# Altium PCB christmas_tree_panel_pcb.PcbDoc
Units mil, origin at the board's own origin, x right, y up, seen from the top; angles counter-clockwise.
Board outline not stored, 2 copper layers (Top Layer, Bottom Layer); 136 components, 0 nets, 304 pads, 116 vias.
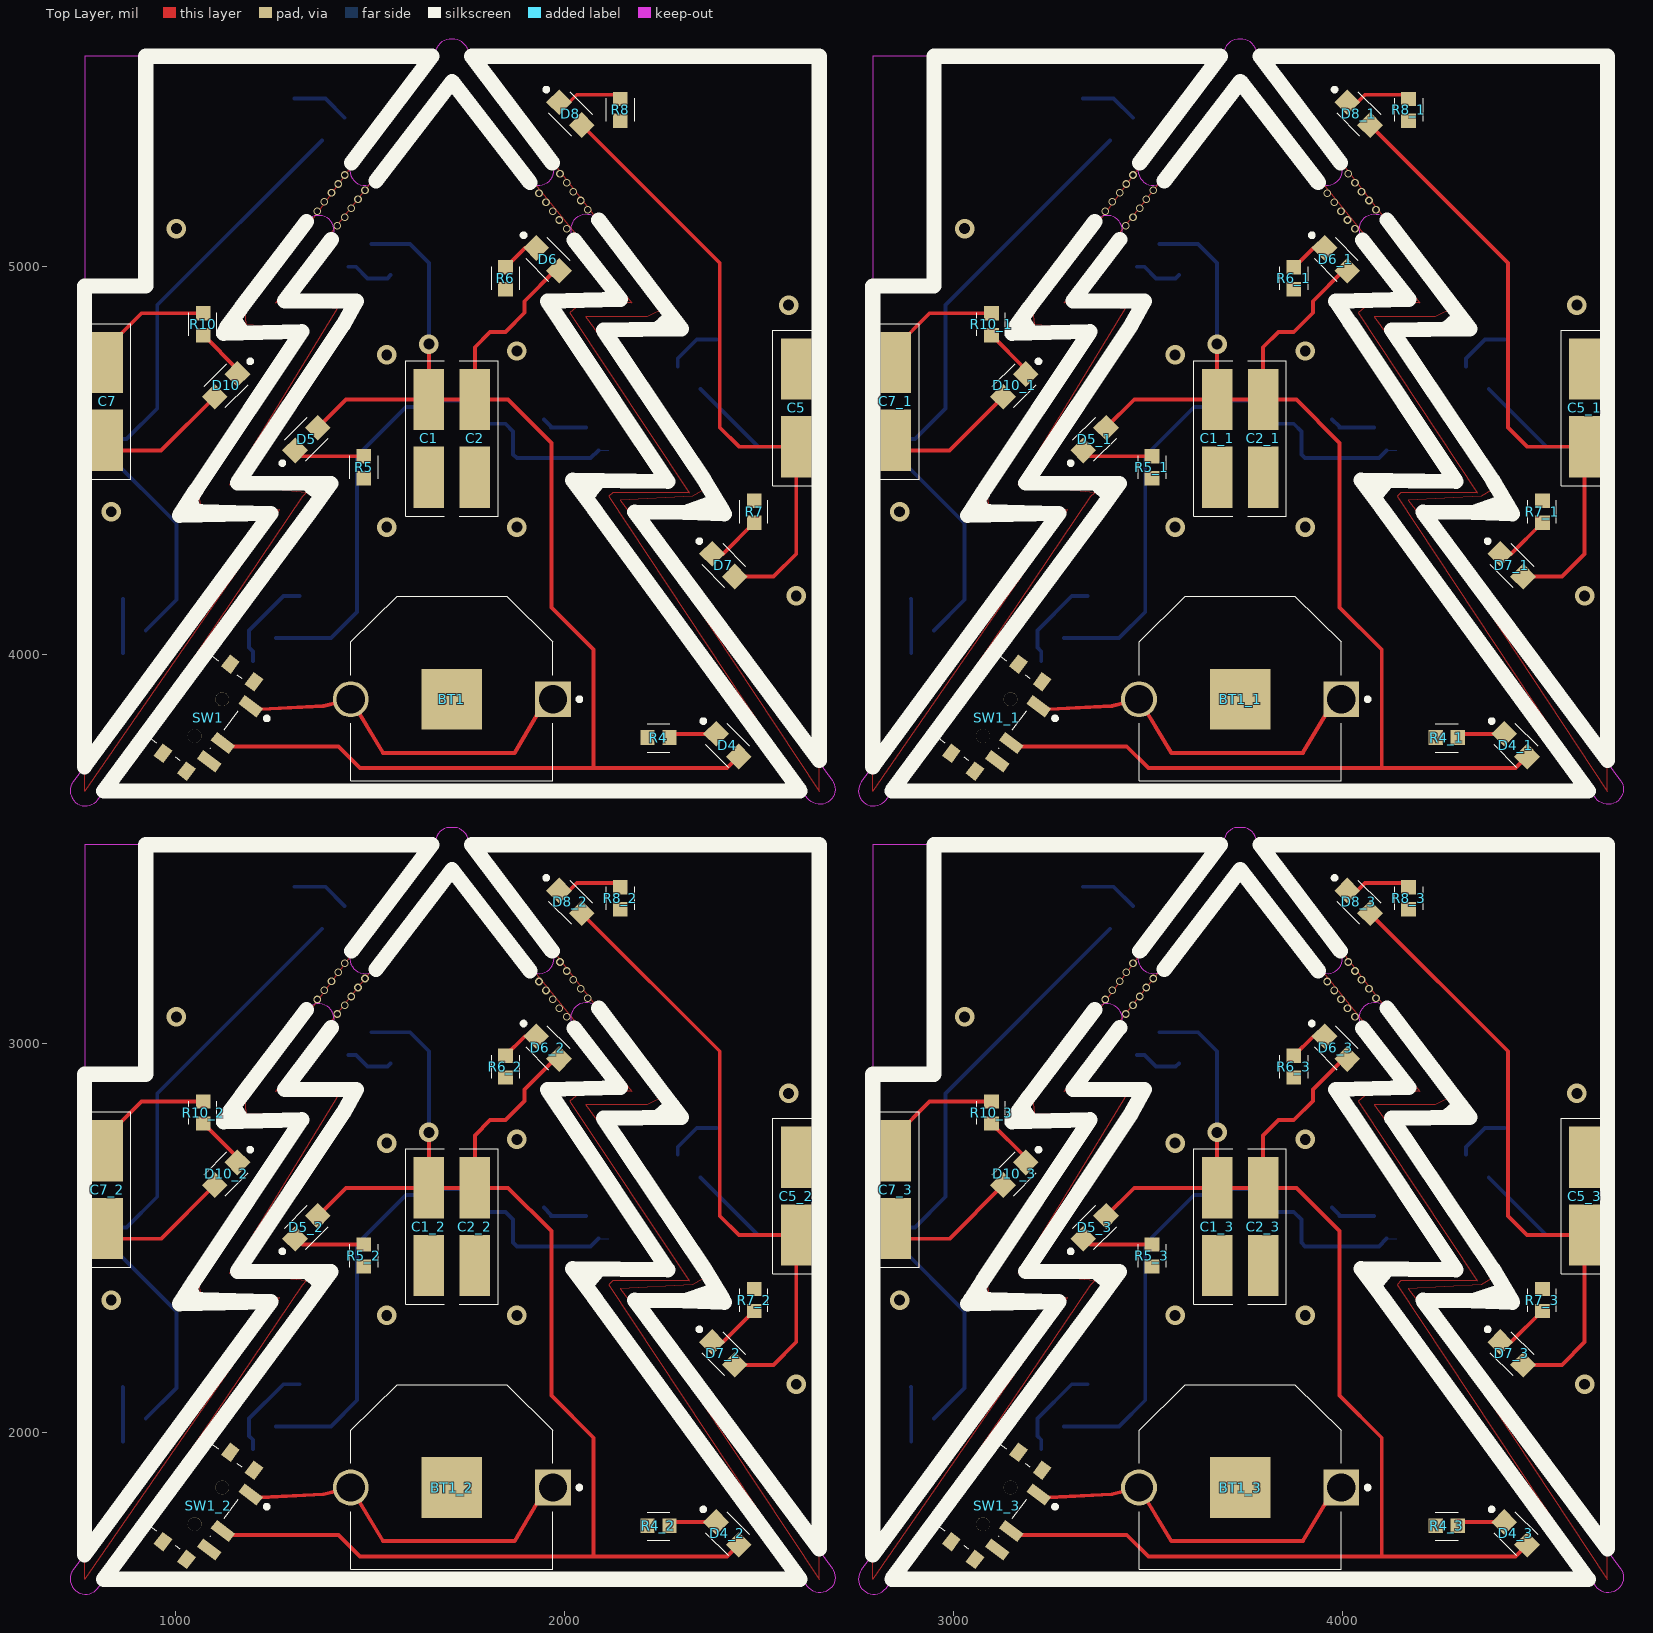
[diagram p0: Top Layer view]
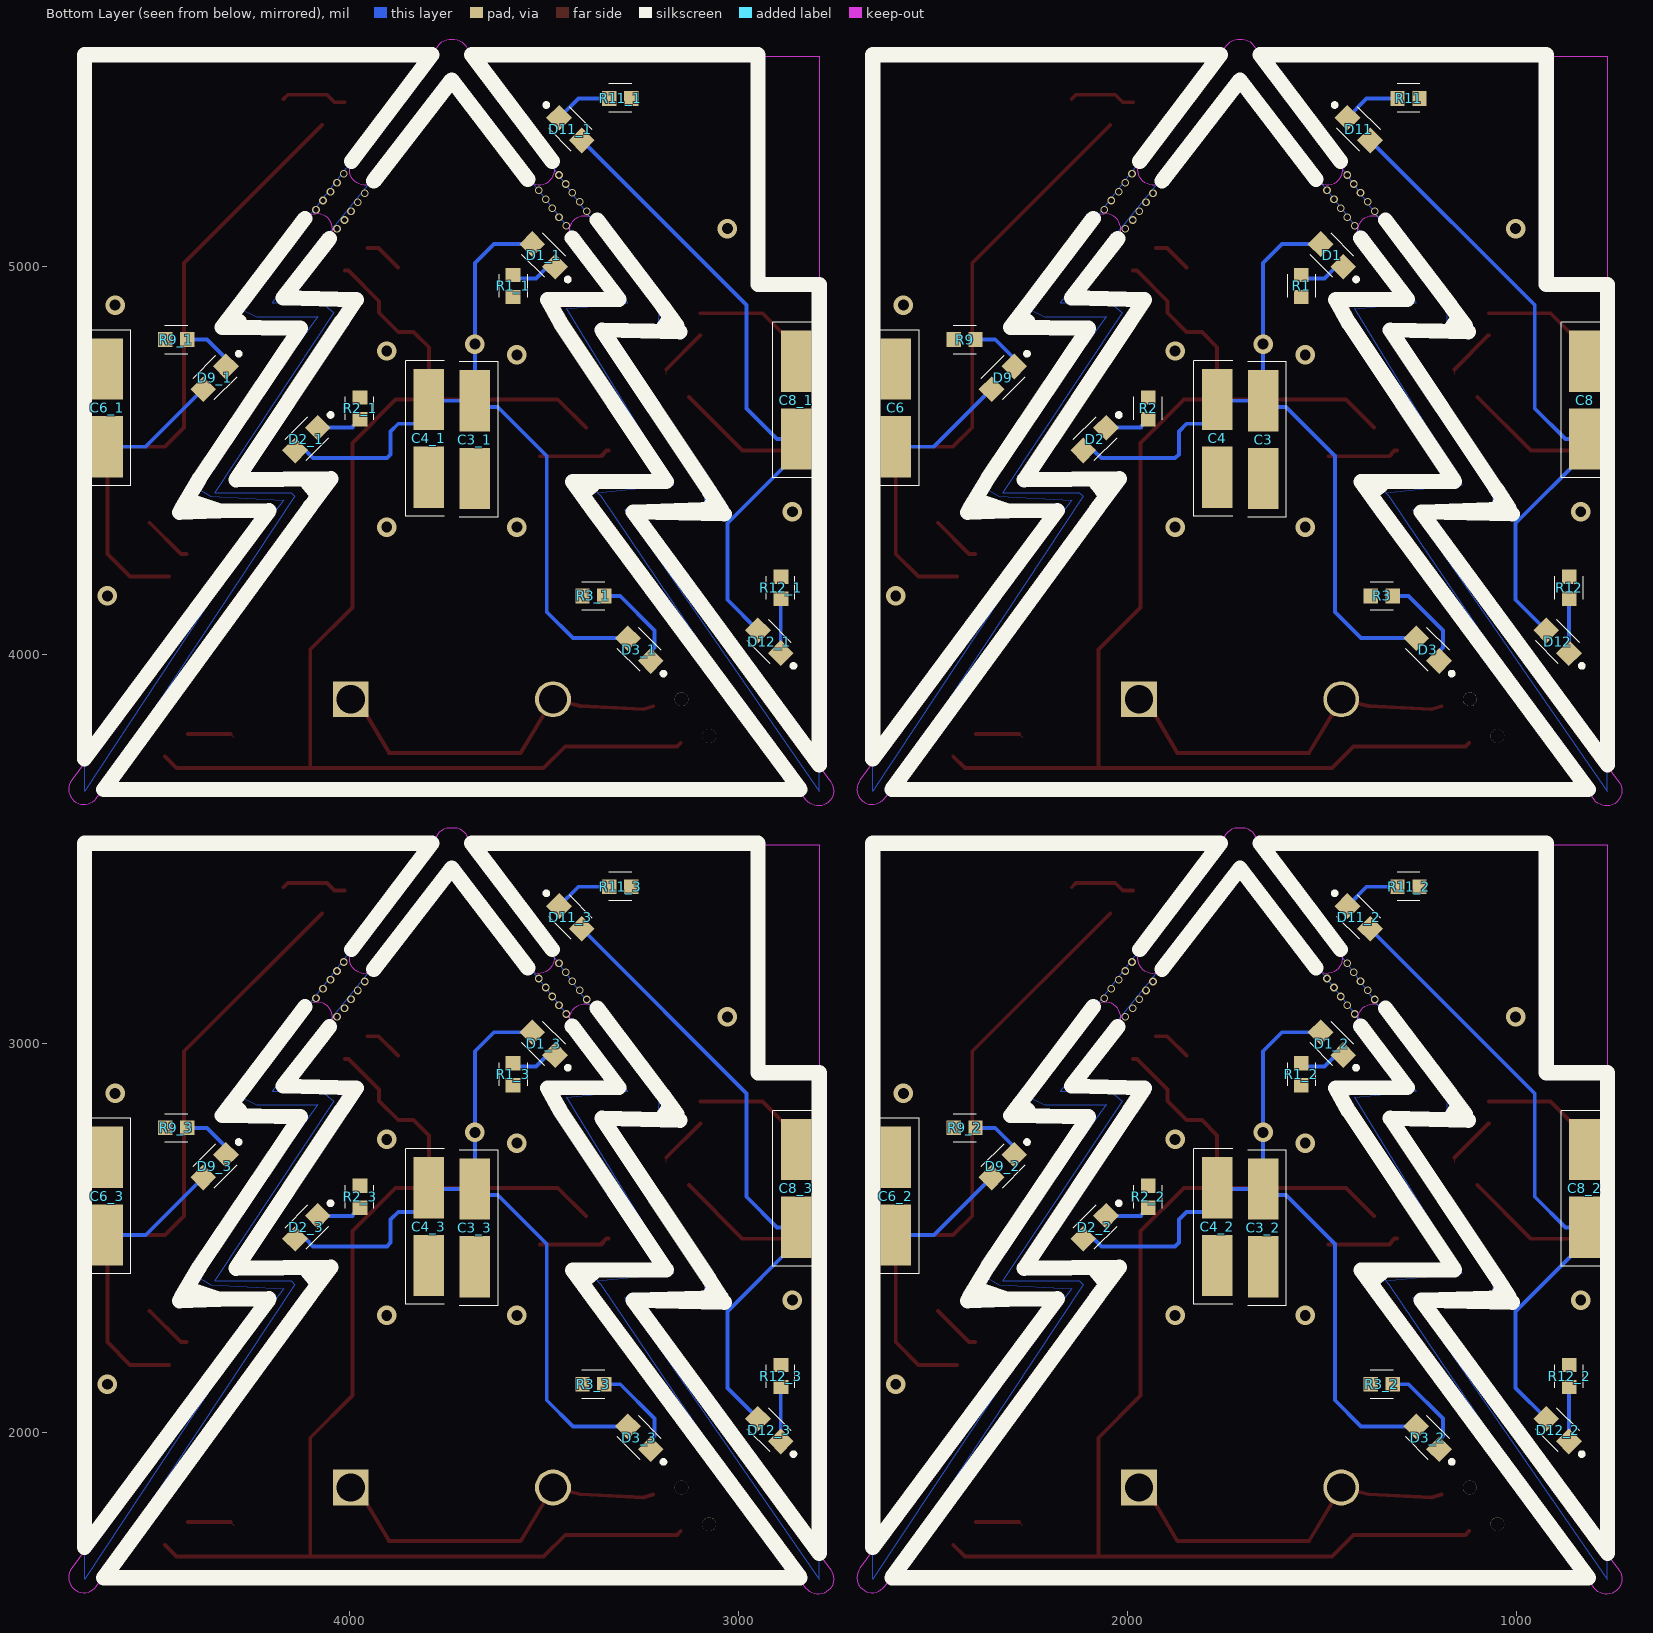
[diagram p1: Bottom Layer view, seen from below]

## Layer stack, top to bottom
Top Solder: solder mask 0.4, Solder Resist, Dk 3.5
Top Layer: signal copper 1.4
Dielectric 1: dielectric 12.6, FR-4, Dk 4.8
Bottom Layer: signal copper 1.4
Bottom Solder: solder mask 0.4, Solder Resist, Dk 3.5
cut-out: 735.47,3674.27 ccw(c767.17,3650.91) 798.88,3627.55 1352.97,4379.53 ccw(c1321.28,4402.91) 1360.66,4402.91 ccw(c1321.28,4402.91) 1321.28,4442.3 1158.37,4442.3 1429.86,4849.54 ccw(c1397.09,4871.38) 1436.48,4871.38 ccw(c1397.09,4871.38) 1397.09,4910.77 1279.67,4910.77 1398.52,5067.07 ccw(c1367.17,5090.91) 1406.56,5090.91 ccw(c1367.17,5090.91) 1335.82,5114.75 1168.89,4895.22 ccw(c1200.24,4871.38) 1200.24,4832 1323.5,4832 1052.01,4424.76 ccw(c1084.78,4402.91) 1084.78,4363.53 1243.34,4363.53
cut-out: 1454.88,5271.32 ccw(c1486.16,5247.39) 1517.45,5223.47 1709.67,5474.83 1901.88,5223.47 ccw(c1933.17,5247.39) 1972.55,5247.39 ccw(c1933.17,5247.39) 1964.45,5271.32 1752.41,5548.61 ccw(c1713.25,5544.36) 1709.67,5583.58 ccw(c1706.08,5544.36) 1666.92,5548.61
cut-out: 764.67,4948.96 922.15,4948.96 922.15,5539.51 764.67,5539.51
cut-out: 2687.57,3678.21 cw(c2655.86,3654.85) 2624.15,3631.48 2070.06,4383.47 cw(c2101.75,4406.85) 2062.37,4406.85 cw(c2101.75,4406.85) 2101.75,4446.23 2264.66,4446.23 1993.17,4853.47 cw(c2025.94,4875.32) 1986.55,4875.32 cw(c2025.94,4875.32) 2025.94,4914.71 2143.36,4914.71 2024.51,5071.01 cw(c2055.86,5094.85) 2016.47,5094.85 cw(c2055.86,5094.85) 2087.21,5118.69 2254.14,4899.16 cw(c2222.79,4875.32) 2222.79,4835.94 2099.53,4835.94 2371.02,4428.69 cw(c2338.25,4406.85) 2338.25,4367.46 2179.7,4367.46
cut-out: 4715.12,3678.21 cw(c4683.42,3654.85) 4651.71,3631.48 4097.62,4383.47 cw(c4129.31,4406.85) 4089.93,4406.85 cw(c4129.31,4406.85) 4129.31,4446.23 4292.22,4446.23 4020.73,4853.47 cw(c4053.5,4875.32) 4014.11,4875.32 cw(c4053.5,4875.32) 4053.5,4914.71 4170.92,4914.71 4052.07,5071.01 cw(c4083.42,5094.85) 4044.03,5094.85 cw(c4083.42,5094.85) 4114.77,5118.69 4281.7,4899.16 cw(c4250.35,4875.32) 4250.35,4835.94 4127.09,4835.94 4398.58,4428.69 cw(c4365.81,4406.85) 4365.81,4367.46 4207.26,4367.46
cut-out: 2792.22,4948.96 2949.7,4948.96 2949.7,5539.51 2792.22,5539.51
cut-out: 3482.44,5271.32 ccw(c3513.72,5247.39) 3545.01,5223.47 3737.22,5474.83 3929.44,5223.47 ccw(c3960.73,5247.39) 4000.11,5247.39 ccw(c3960.73,5247.39) 3992.01,5271.32 3779.97,5548.61 ccw(c3740.81,5544.36) 3737.22,5583.58 ccw(c3733.64,5544.36) 3694.48,5548.61
cut-out: 2763.02,3674.27 ccw(c2794.73,3650.91) 2826.44,3627.55 3380.53,4379.53 ccw(c3348.84,4402.91) 3388.22,4402.91 ccw(c3348.84,4402.91) 3348.84,4442.3 3185.93,4442.3 3457.42,4849.54 ccw(c3424.65,4871.38) 3464.04,4871.38 ccw(c3424.65,4871.38) 3424.65,4910.77 3307.23,4910.77 3426.08,5067.07 ccw(c3394.73,5090.91) 3434.12,5090.91 ccw(c3394.73,5090.91) 3363.38,5114.75 3196.45,4895.22 ccw(c3227.8,4871.38) 3227.8,4832 3351.06,4832 3079.57,4424.76 ccw(c3112.34,4402.91) 3112.34,4363.53 3270.89,4363.53
cut-out: 2687.57,1650.65 cw(c2655.86,1627.29) 2624.15,1603.93 2070.06,2355.91 cw(c2101.75,2379.29) 2062.37,2379.29 cw(c2101.75,2379.29) 2101.75,2418.67 2264.66,2418.67 1993.17,2825.91 cw(c2025.94,2847.76) 1986.55,2847.76 cw(c2025.94,2847.76) 2025.94,2887.15 2143.36,2887.15 2024.51,3043.45 cw(c2055.86,3067.29) 2016.47,3067.29 cw(c2055.86,3067.29) 2087.21,3091.13 2254.14,2871.6 cw(c2222.79,2847.76) 2222.79,2808.38 2099.53,2808.38 2371.02,2401.14 cw(c2338.25,2379.29) 2338.25,2339.9 2179.7,2339.9
cut-out: 764.67,2921.4 922.15,2921.4 922.15,3511.95 764.67,3511.95
cut-out: 1454.88,3243.76 ccw(c1486.16,3219.83) 1517.45,3195.91 1709.67,3447.27 1901.88,3195.91 ccw(c1933.17,3219.83) 1972.55,3219.83 ccw(c1933.17,3219.83) 1964.45,3243.76 1752.41,3521.05 ccw(c1713.25,3516.8) 1709.67,3556.02 ccw(c1706.08,3516.8) 1666.92,3521.05
cut-out: 735.47,1646.71 ccw(c767.17,1623.35) 798.88,1599.99 1352.97,2351.97 ccw(c1321.28,2375.35) 1360.66,2375.35 ccw(c1321.28,2375.35) 1321.28,2414.74 1158.37,2414.74 1429.86,2821.98 ccw(c1397.09,2843.82) 1436.48,2843.82 ccw(c1397.09,2843.82) 1397.09,2883.21 1279.67,2883.21 1398.52,3039.51 ccw(c1367.17,3063.35) 1406.56,3063.35 ccw(c1367.17,3063.35) 1335.82,3087.19 1168.89,2867.66 ccw(c1200.24,2843.82) 1200.24,2804.44 1323.5,2804.44 1052.01,2397.2 ccw(c1084.78,2375.35) 1084.78,2335.97 1243.34,2335.97
cut-out: 4715.12,1650.65 cw(c4683.42,1627.29) 4651.71,1603.93 4097.62,2355.91 cw(c4129.31,2379.29) 4089.93,2379.29 cw(c4129.31,2379.29) 4129.31,2418.67 4292.22,2418.67 4020.73,2825.91 cw(c4053.5,2847.76) 4014.11,2847.76 cw(c4053.5,2847.76) 4053.5,2887.15 4170.92,2887.15 4052.07,3043.45 cw(c4083.42,3067.29) 4044.03,3067.29 cw(c4083.42,3067.29) 4114.77,3091.13 4281.7,2871.6 cw(c4250.35,2847.76) 4250.35,2808.38 4127.09,2808.38 4398.58,2401.14 cw(c4365.81,2379.29) 4365.81,2339.9 4207.26,2339.9
cut-out: 2792.22,2921.4 2949.7,2921.4 2949.7,3511.95 2792.22,3511.95
cut-out: 3482.44,3243.76 ccw(c3513.72,3219.83) 3545.01,3195.91 3737.22,3447.27 3929.44,3195.91 ccw(c3960.73,3219.83) 4000.11,3219.83 ccw(c3960.73,3219.83) 3992.01,3243.76 3779.97,3521.05 ccw(c3740.81,3516.8) 3737.22,3556.02 ccw(c3733.64,3516.8) 3694.48,3521.05
cut-out: 2763.02,1646.71 ccw(c2794.73,1623.35) 2826.44,1599.99 3380.53,2351.97 ccw(c3348.84,2375.35) 3388.22,2375.35 ccw(c3348.84,2375.35) 3348.84,2414.74 3185.93,2414.74 3457.42,2821.98 ccw(c3424.65,2843.82) 3464.04,2843.82 ccw(c3424.65,2843.82) 3424.65,2883.21 3307.23,2883.21 3426.08,3039.51 ccw(c3394.73,3063.35) 3434.12,3063.35 ccw(c3394.73,3063.35) 3363.38,3087.19 3196.45,2867.66 ccw(c3227.8,2843.82) 3227.8,2804.44 3351.06,2804.44 3079.57,2397.2 ccw(c3112.34,2375.35) 3112.34,2335.97 3270.89,2335.97

## Design rules (kind name [scope] priority, off if disabled: settings)
Clearance [All] p1: gap=10 ignorepadtopadclearanceinfootprint=FALSE except(0: Arc-Hole Track-Hole SMDPad-Hole THPad-Hole Via-Hole Fill-Hole Poly-Hole Region-Hole Text-Hole)
PolygonConnect [All] p1: connectstyle=Relief reliefconductorwidth=10 reliefentries=4 polygonreliefangle="90 Angle" airgapwidth=10
RoutingVias [All] p1: holewidth=28 width=50 viastyle="Through Hole" minholewidth=28 minwidth=50 maxholewidth=28 maxwidth=50
SolderMaskExpansion [All] p1: expansion=4 istentingtop=FALSE
Width [All] p1: maxlimit=10 minlimit=10 preferedwidth=10
30 further rules are at their usual default settings.

## Components (designator, comment, footprint, x,y, rotation, side; value= is the part's Value field where it differs from the comment)
BT1 "3001" KSTN-3001_V 1709.55,3885.97 r180 top
BT1_1 "3001" KSTN-3001_V 3737.11,3885.97 r180 top (schematic designator BT1)
BT1_2 "3001" KSTN-3001_V 1709.55,1858.41 r180 top (schematic designator BT1)
BT1_3 "3001" KSTN-3001_V 3737.11,1858.41 r180 top (schematic designator BT1)
C1 "conn_pcb" pcb_connector 1650.49,4656.84 r270 top
C1_1 "conn_pcb" pcb_connector 3678.05,4656.84 r270 top (schematic designator C1)
C1_2 "conn_pcb" pcb_connector 1650.49,2629.28 r270 top (schematic designator C1)
C1_3 "conn_pcb" pcb_connector 3678.05,2629.28 r270 top (schematic designator C1)
C2 "conn_pcb" pcb_connector 1768.6,4656.84 r270 top
C2_1 "conn_pcb" pcb_connector 3796.16,4656.84 r270 top (schematic designator C2)
C2_2 "conn_pcb" pcb_connector 1768.6,2629.28 r270 top (schematic designator C2)
C2_3 "conn_pcb" pcb_connector 3796.16,2629.28 r270 top (schematic designator C2)
C3 "conn_pcb" pcb_connector 1650.49,4653.69 r270 bottom
C3_1 "conn_pcb" pcb_connector 3678.05,4653.69 r270 bottom (schematic designator C3)
C3_2 "conn_pcb" pcb_connector 1650.49,2626.13 r270 bottom (schematic designator C3)
C3_3 "conn_pcb" pcb_connector 3678.05,2626.13 r270 bottom (schematic designator C3)
C4 "conn_pcb" pcb_connector 1768.6,4656.84 r270 bottom
C4_1 "conn_pcb" pcb_connector 3796.16,4656.84 r270 bottom (schematic designator C4)
C4_2 "conn_pcb" pcb_connector 1768.6,2629.28 r270 bottom (schematic designator C4)
C4_3 "conn_pcb" pcb_connector 3796.16,2629.28 r270 bottom (schematic designator C4)
C5 "conn_pcb" pcb_connector 2595.37,4535.58 r90 top
C5_1 "conn_pcb" pcb_connector 4622.93,4535.58 r90 top (schematic designator C5)
C5_2 "conn_pcb" pcb_connector 2595.37,2508.02 r90 top (schematic designator C5)
C5_3 "conn_pcb" pcb_connector 4622.93,2508.02 r90 top (schematic designator C5)
C6 "conn_pcb" pcb_connector 2595.37,4535.58 r90 bottom
C6_1 "conn_pcb" pcb_connector 4622.93,4535.58 r90 bottom (schematic designator C6)
C6_2 "conn_pcb" pcb_connector 2595.37,2508.02 r90 bottom (schematic designator C6)
C6_3 "conn_pcb" pcb_connector 4622.93,2508.02 r90 bottom (schematic designator C6)
C7 "conn_pcb" pcb_connector 823.72,4552.11 r90 top
C7_1 "conn_pcb" pcb_connector 2851.28,4552.11 r90 top (schematic designator C7)
C7_2 "conn_pcb" pcb_connector 823.72,2524.55 r90 top (schematic designator C7)
C7_3 "conn_pcb" pcb_connector 2851.28,2524.55 r90 top (schematic designator C7)
C8 "conn_pcb" pcb_connector 823.72,4555.26 r90 bottom
C8_1 "conn_pcb" pcb_connector 2851.28,4555.26 r90 bottom (schematic designator C8)
C8_2 "conn_pcb" pcb_connector 823.72,2527.7 r90 bottom (schematic designator C8)
C8_3 "conn_pcb" pcb_connector 2851.28,2527.7 r90 bottom (schematic designator C8)
D1 "APHCM2012SYCK-F01" FP-APHCM2012SYCK-F01-MFG 1473.33,5027.7 r45 bottom
D1_1 "APHCM2012SYCK-F01" FP-APHCM2012SYCK-F01-MFG 3500.89,5027.7 r45 bottom (schematic designator D1)
D1_2 "APHCM2012SYCK-F01" FP-APHCM2012SYCK-F01-MFG 1473.33,3000.14 r45 bottom (schematic designator D1)
D1_3 "APHCM2012SYCK-F01" FP-APHCM2012SYCK-F01-MFG 3500.89,3000.14 r45 bottom (schematic designator D1)
D2 "APHCM2012SYCK-F01" FP-APHCM2012SYCK-F01-MFG 2083.56,4555.26 r315 bottom
D2_1 "APHCM2012SYCK-F01" FP-APHCM2012SYCK-F01-MFG 4111.12,4555.26 r315 bottom (schematic designator D2)
D2_2 "APHCM2012SYCK-F01" FP-APHCM2012SYCK-F01-MFG 2083.56,2527.7 r315 bottom (schematic designator D2)
D2_3 "APHCM2012SYCK-F01" FP-APHCM2012SYCK-F01-MFG 4111.12,2527.7 r315 bottom (schematic designator D2)
D3 "APHCM2012SYCK-F01" FP-APHCM2012SYCK-F01-MFG 1227.26,4013.92 r45 bottom
D3_1 "APHCM2012SYCK-F01" FP-APHCM2012SYCK-F01-MFG 3254.82,4013.92 r45 bottom (schematic designator D3)
D3_2 "APHCM2012SYCK-F01" FP-APHCM2012SYCK-F01-MFG 1227.26,1986.36 r45 bottom (schematic designator D3)
D3_3 "APHCM2012SYCK-F01" FP-APHCM2012SYCK-F01-MFG 3254.82,1986.36 r45 bottom (schematic designator D3)
D4 "APHCM2012SYCK-F01" FP-APHCM2012SYCK-F01-MFG 2418.21,3767.86 r315 top
D4_1 "APHCM2012SYCK-F01" FP-APHCM2012SYCK-F01-MFG 4445.77,3767.86 r315 top (schematic designator D4)
D4_2 "APHCM2012SYCK-F01" FP-APHCM2012SYCK-F01-MFG 2418.21,1740.3 r315 top (schematic designator D4)
D4_3 "APHCM2012SYCK-F01" FP-APHCM2012SYCK-F01-MFG 4445.77,1740.3 r315 top (schematic designator D4)
D5 "APHCM2012SYCK-F01" FP-APHCM2012SYCK-F01-MFG 1335.53,4555.26 r45 top
D5_1 "APHCM2012SYCK-F01" FP-APHCM2012SYCK-F01-MFG 3363.09,4555.26 r45 top (schematic designator D5)
D5_2 "APHCM2012SYCK-F01" FP-APHCM2012SYCK-F01-MFG 1335.53,2527.7 r45 top (schematic designator D5)
D5_3 "APHCM2012SYCK-F01" FP-APHCM2012SYCK-F01-MFG 3363.09,2527.7 r45 top (schematic designator D5)
D6 "APHCM2012SYCK-F01" FP-APHCM2012SYCK-F01-MFG 1955.91,5017.56 r315 top
D6_1 "APHCM2012SYCK-F01" FP-APHCM2012SYCK-F01-MFG 3983.47,5017.56 r315 top (schematic designator D6)
D6_2 "APHCM2012SYCK-F01" FP-APHCM2012SYCK-F01-MFG 1955.91,2990 r315 top (schematic designator D6)
D6_3 "APHCM2012SYCK-F01" FP-APHCM2012SYCK-F01-MFG 3983.47,2990 r315 top (schematic designator D6)
D7 "APHCM2012SYCK-F01" FP-APHCM2012SYCK-F01-MFG 2408.07,4230.75 r315 top
D7_1 "APHCM2012SYCK-F01" FP-APHCM2012SYCK-F01-MFG 4435.63,4230.75 r315 top (schematic designator D7)
D7_2 "APHCM2012SYCK-F01" FP-APHCM2012SYCK-F01-MFG 2408.07,2203.2 r315 top (schematic designator D7)
D7_3 "APHCM2012SYCK-F01" FP-APHCM2012SYCK-F01-MFG 4435.63,2203.2 r315 top (schematic designator D7)
D8 "APHCM2012SYCK-F01" FP-APHCM2012SYCK-F01-MFG 2014.37,5392.17 r315 top
D8_1 "APHCM2012SYCK-F01" FP-APHCM2012SYCK-F01-MFG 4041.93,5392.17 r315 top (schematic designator D8)
D8_2 "APHCM2012SYCK-F01" FP-APHCM2012SYCK-F01-MFG 2014.37,3364.61 r315 top (schematic designator D8)
D8_3 "APHCM2012SYCK-F01" FP-APHCM2012SYCK-F01-MFG 4041.93,3364.61 r315 top (schematic designator D8)
D9 "APHCM2012SYCK-F01" FP-APHCM2012SYCK-F01-MFG 2319.78,4712.74 r315 bottom
D9_1 "APHCM2012SYCK-F01" FP-APHCM2012SYCK-F01-MFG 4347.34,4712.74 r315 bottom (schematic designator D9)
D9_2 "APHCM2012SYCK-F01" FP-APHCM2012SYCK-F01-MFG 2319.78,2685.18 r315 bottom (schematic designator D9)
D9_3 "APHCM2012SYCK-F01" FP-APHCM2012SYCK-F01-MFG 4347.34,2685.18 r315 bottom (schematic designator D9)
D10 "APHCM2012SYCK-F01" FP-APHCM2012SYCK-F01-MFG 1128.84,4693.06 r225 top
D10_1 "APHCM2012SYCK-F01" FP-APHCM2012SYCK-F01-MFG 3156.4,4693.06 r225 top (schematic designator D10)
D10_2 "APHCM2012SYCK-F01" FP-APHCM2012SYCK-F01-MFG 1128.84,2665.5 r225 top (schematic designator D10)
D10_3 "APHCM2012SYCK-F01" FP-APHCM2012SYCK-F01-MFG 3156.4,2665.5 r225 top (schematic designator D10)
D11 "APHCM2012SYCK-F01" FP-APHCM2012SYCK-F01-MFG 1404.43,5352.5 r225 bottom
D11_1 "APHCM2012SYCK-F01" FP-APHCM2012SYCK-F01-MFG 3431.99,5352.5 r225 bottom (schematic designator D11)
D11_2 "APHCM2012SYCK-F01" FP-APHCM2012SYCK-F01-MFG 1404.43,3324.95 r225 bottom (schematic designator D11)
D11_3 "APHCM2012SYCK-F01" FP-APHCM2012SYCK-F01-MFG 3431.99,3324.95 r225 bottom (schematic designator D11)
D12 "APHCM2012SYCK-F01" FP-APHCM2012SYCK-F01-MFG 892.91,4033.9 r45 bottom
D12_1 "APHCM2012SYCK-F01" FP-APHCM2012SYCK-F01-MFG 2920.47,4033.9 r45 bottom (schematic designator D12)
D12_2 "APHCM2012SYCK-F01" FP-APHCM2012SYCK-F01-MFG 892.91,2006.34 r45 bottom (schematic designator D12)
D12_3 "APHCM2012SYCK-F01" FP-APHCM2012SYCK-F01-MFG 2920.47,2006.34 r45 bottom (schematic designator D12)
R1 "CRCW0603100RJNEA" FP-CRCW0603-e3-IPC_B 1552.07,4948.96 r90 bottom
R1_1 "CRCW0603100RJNEA" FP-CRCW0603-e3-IPC_B 3579.63,4948.96 r90 bottom (schematic designator R1)
R1_2 "CRCW0603100RJNEA" FP-CRCW0603-e3-IPC_B 1552.07,2921.4 r90 bottom (schematic designator R1)
R1_3 "CRCW0603100RJNEA" FP-CRCW0603-e3-IPC_B 3579.63,2921.4 r90 bottom (schematic designator R1)
R2 "CRCW0603100RJNEA" FP-CRCW0603-e3-IPC_B 1945.77,4634 r270 bottom
R2_1 "CRCW0603100RJNEA" FP-CRCW0603-e3-IPC_B 3973.33,4634 r270 bottom (schematic designator R2)
R2_2 "CRCW0603100RJNEA" FP-CRCW0603-e3-IPC_B 1945.77,2606.44 r270 bottom (schematic designator R2)
R2_3 "CRCW0603100RJNEA" FP-CRCW0603-e3-IPC_B 3973.33,2606.44 r270 bottom (schematic designator R2)
R3 "CRCW0603100RJNEA" FP-CRCW0603-e3-IPC_B 1345.37,4151.72 r180 bottom
R3_1 "CRCW0603100RJNEA" FP-CRCW0603-e3-IPC_B 3372.93,4151.72 r180 bottom (schematic designator R3)
R3_2 "CRCW0603100RJNEA" FP-CRCW0603-e3-IPC_B 1345.37,2124.16 r180 bottom (schematic designator R3)
R3_3 "CRCW0603100RJNEA" FP-CRCW0603-e3-IPC_B 3372.93,2124.16 r180 bottom (schematic designator R3)
R4 "CRCW0603100RJNEA" FP-CRCW0603-e3-IPC_B 2241.04,3787.54 r0 top
R4_1 "CRCW0603100RJNEA" FP-CRCW0603-e3-IPC_B 4268.6,3787.54 r0 top (schematic designator R4)
R4_2 "CRCW0603100RJNEA" FP-CRCW0603-e3-IPC_B 2241.04,1759.98 r0 top (schematic designator R4)
R4_3 "CRCW0603100RJNEA" FP-CRCW0603-e3-IPC_B 4268.6,1759.98 r0 top (schematic designator R4)
R5 "CRCW0603100RJNEA" FP-CRCW0603-e3-IPC_B 1482.58,4482.73 r90 top
R5_1 "CRCW0603100RJNEA" FP-CRCW0603-e3-IPC_B 3510.14,4482.73 r90 top (schematic designator R5)
R5_2 "CRCW0603100RJNEA" FP-CRCW0603-e3-IPC_B 1482.58,2455.17 r90 top (schematic designator R5)
R5_3 "CRCW0603100RJNEA" FP-CRCW0603-e3-IPC_B 3510.14,2455.17 r90 top (schematic designator R5)
R6 "CRCW0603100RJNEA" FP-CRCW0603-e3-IPC_B 1847.34,4968.65 r90 top
R6_1 "CRCW0603100RJNEA" FP-CRCW0603-e3-IPC_B 3874.9,4968.65 r90 top (schematic designator R6)
R6_2 "CRCW0603100RJNEA" FP-CRCW0603-e3-IPC_B 1847.34,2941.09 r90 top (schematic designator R6)
R6_3 "CRCW0603100RJNEA" FP-CRCW0603-e3-IPC_B 3874.9,2941.09 r90 top (schematic designator R6)
R7 "CRCW0603100RJNEA" FP-CRCW0603-e3-IPC_B 2487.11,4368.25 r270 top
R7_1 "CRCW0603100RJNEA" FP-CRCW0603-e3-IPC_B 4514.67,4368.25 r270 top (schematic designator R7)
R7_2 "CRCW0603100RJNEA" FP-CRCW0603-e3-IPC_B 2487.11,2340.69 r270 top (schematic designator R7)
R7_3 "CRCW0603100RJNEA" FP-CRCW0603-e3-IPC_B 4514.67,2340.69 r270 top (schematic designator R7)
R8 "CRCW0603100RJNEA" FP-CRCW0603-e3-IPC_B 2142.62,5401.72 r90 top
R8_1 "CRCW0603100RJNEA" FP-CRCW0603-e3-IPC_B 4170.18,5401.72 r90 top (schematic designator R8)
R8_2 "CRCW0603100RJNEA" FP-CRCW0603-e3-IPC_B 2142.62,3374.16 r90 top (schematic designator R8)
R8_3 "CRCW0603100RJNEA" FP-CRCW0603-e3-IPC_B 4170.18,3374.16 r90 top (schematic designator R8)
R9 "CRCW0603100RJNEA" FP-CRCW0603-e3-IPC_B 2418.21,4811.17 r180 bottom
R9_1 "CRCW0603100RJNEA" FP-CRCW0603-e3-IPC_B 4445.77,4811.17 r180 bottom (schematic designator R9)
R9_2 "CRCW0603100RJNEA" FP-CRCW0603-e3-IPC_B 2418.21,2783.61 r180 bottom (schematic designator R9)
R9_3 "CRCW0603100RJNEA" FP-CRCW0603-e3-IPC_B 4445.77,2783.61 r180 bottom (schematic designator R9)
R10 "CRCW0603100RJNEA" FP-CRCW0603-e3-IPC_B 1069.78,4850.54 r270 top
R10_1 "CRCW0603100RJNEA" FP-CRCW0603-e3-IPC_B 3097.34,4850.54 r270 top (schematic designator R10)
R10_2 "CRCW0603100RJNEA" FP-CRCW0603-e3-IPC_B 1069.78,2822.98 r270 top (schematic designator R10)
R10_3 "CRCW0603100RJNEA" FP-CRCW0603-e3-IPC_B 3097.34,2822.98 r270 top (schematic designator R10)
R11 "CRCW0603100RJNEA" FP-CRCW0603-e3-IPC_B 1276.48,5431.24 r0 bottom
R11_1 "CRCW0603100RJNEA" FP-CRCW0603-e3-IPC_B 3304.04,5431.24 r0 bottom (schematic designator R11)
R11_2 "CRCW0603100RJNEA" FP-CRCW0603-e3-IPC_B 1276.48,3403.69 r0 bottom (schematic designator R11)
R11_3 "CRCW0603100RJNEA" FP-CRCW0603-e3-IPC_B 3304.04,3403.69 r0 bottom (schematic designator R11)
R12 "CRCW0603100RJNEA" FP-CRCW0603-e3-IPC_B 863.09,4172.76 r270 bottom
R12_1 "CRCW0603100RJNEA" FP-CRCW0603-e3-IPC_B 2890.65,4172.76 r270 bottom (schematic designator R12)
R12_2 "CRCW0603100RJNEA" FP-CRCW0603-e3-IPC_B 863.09,2145.21 r270 bottom (schematic designator R12)
R12_3 "CRCW0603100RJNEA" FP-CRCW0603-e3-IPC_B 2890.65,2145.21 r270 bottom (schematic designator R12)
SW1 "PCM12SMTR" FP-PCM12SMTR-MFG 1059.87,3856.58 r233 top
SW1_1 "PCM12SMTR" FP-PCM12SMTR-MFG 3087.43,3856.58 r233 top (schematic designator SW1)
SW1_2 "PCM12SMTR" FP-PCM12SMTR-MFG 1059.87,1829.02 r233 top (schematic designator SW1)
SW1_3 "PCM12SMTR" FP-PCM12SMTR-MFG 3087.43,1829.02 r233 top (schematic designator SW1)

## Footprints (in the part's own frame and the unit in brackets; to place one, negate y for a bottom-side part, rotate by r counter-clockwise, add the part's x,y. Pads: shape width x height; smd on the part's side, far side on the other; paste and mask are expansions set on the pad)
FP-APHCM2012SYCK-F01-MFG [mm]
  rect 1.2x1.2 smd paste+0 mask+0: 1(-1.05,0) 2(1.05,0)
  silkscreen extent -2.35,-0.98 1.05,0.98, body extent -1,-0.62 1,0.63, height 0.5
FP-CRCW0603-e3-IPC_B [mil]
  rect 36.81x37.88 smd paste+0 mask+0: 1(-28.17,0) 2(28.17,0)
  silkscreen extent -30,-37 30,35, body extent -31,-17 31,17, height 20
FP-PCM12SMTR-MFG [mm]
  rect 0.7x1.5 smd paste+0 mask+0: 1(-2.25,2.5) 2(0.75,2.5) 3(2.25,2.5)
  rect 1x0.8 smd paste+0 mask+0: 4(-3.65,1.715) 5(3.65,1.715) 6(-3.65,-0.215) 7(3.65,-0.215)
  round 0.9 hole 0.9 unplated paste-1000 mask+0: ""(-1.5,0.75) ""(1.5,0.75)
  silkscreen extent -3.35,-2.05 3.35,3.95, body extent -4.25,-2.15 4.25,3.35, height 0.25
KSTN-3001_V [mm] "THD, 2-Leads, Body 13.21x12.07mm"
  rect 2.35x2.35 hole 1.85: 1(-6.605,0)
  round 2.35 hole 1.85: 2(6.605,0)
  rect 3.96x3.96 smd: 3(0,0)
  silkscreen extent -8.45,-6.73 6.61,5.34, body extent -6.61,-6.73 6.61,5.34, height 3
pcb_connector [mm]
  rect 4x2 smd: 0(0,0) 1(5.08,0)
  silkscreen extent -2.54,-1.52 7.62,1.02

## Part data
BT1 BT1_1 BT1_2 BT1_3: library part CMP-2000-05463-1, "Holder Battery Coin, 12 mm, 2-Pin THD, RoHS", Manufacturer=Keystone, Package Description="2-Pin Through Hole Device, Body 13.21 x 12.07 mm", Datasheet URL=https://datasheet.ciiva.com/3/3001-3954.pdf, Datasheet Version="Rev. H, 09/2006", Manufacturer URL=http://www.keyelco.com/, Mounting Technology=ThroughHole, Package Reference=3001
D1 D1_1 D1_2 D1_3 D2 D2_1 D2_2 D2_3 D3 D3_1 D3_2 D3_3 D4 D4_1 D4_2 D4_3 D5 D5_1 D5_2 D5_3 D6 D6_1 D6_2 D6_3 D7 D7_1 D7_2 D7_3 D8 D8_1 D8_2 D8_3 D9 D9_1 D9_2 D9_3 D10 D10_1 D10_2 D10_3 D11 D11_1 D11_2 D11_3 D12 D12_1 D12_2 D12_3: library part CMP-44529-000064-1, "LED YELLOW CLEAR CHIP SMD", Case Code (Imperial)=0805, Case Code (Metric)=2012, Color=Yellow, Forward Current=20mA, Forward Voltage=2V, Illumination Color=Green, Lens Color=Clear, Max Operating Temperature=85°C, Min Operating Temperature=-40°C, Package Quantity=2000, Case/Package=0805, Dominant Wavelength=590nm, Height=0.4mm, Lead Free="Lead Free", Length=2mm, Lens Style=Clear, Luminous Intensity=150mcd, Mount="Surface Mount", Number of LEDs=1, Number of Pins=2, Packaging="Tape and Reel", RoHS Compliant=Yes, Series=APHCM, Test Current=20mA, Viewing Angle=110°, Wavelength=590nm, Width=1.25mm
R1 R1_1 R1_2 R1_3 R2 R2_1 R2_2 R2_3 R3 R3_1 R3_2 R3_3 R4 R4_1 R4_2 R4_3 R5 R5_1 R5_2 R5_3 R6 R6_1 R6_2 R6_3 R7 R7_1 R7_2 R7_3 R8 R8_1 R8_2 R8_3 R9 R9_1 R9_2 R9_3 R10 R10_1 R10_2 R10_3 R11 R11_1 R11_2 R11_3 R12 R12_1 R12_2 R12_3: library part CMP-2000-03827-2, "RES Thick Film, 100Ω, 5%, 0.1W, 200ppm/°C, 0603", Case Code (Imperial)=0603, Case Code (Metric)=1608, Max Operating Temperature=155°C, Max Power Dissipation=100mW, Min Operating Temperature=-55°C, Package Quantity=1, Resistance=100R, Temperature Coefficient=200ppm/°C, Tolerance=5%, Voltage Rating=75V, Case/Package=0603, Composition="Thick Film", Contact Plating=Tin, Depth=0.85mm, Features="Automotive AEC-Q200", Height=0.02inch, Length=1.55mm, Military Standard=Not, Number of Terminations=2, Packaging="Tape and Reel", Power Rating=100mW, Radiation Hardening=No, Termination=SMD/SMT, Weight=7.1E-05oz, Width=0.85mm
SW1 SW1_1 SW1_2 SW1_3: library part CMP-2000-06884-2, "SWITCH SLIDE SPDT 300MA 6V", Contact Current Rating=300mA, Contact Resistance=70mR, Insulation Resistance=100mR, Max Operating Temperature=85°C, Max Voltage Rating (DC)=6V, Min Operating Temperature=-20°C, Package Quantity=1, Actuator Length=1.5mm, Actuator Material=Nylon, Actuator Type=Standard, Contact Material="Copper Alloy", Contact Plating=Silver, Current Rating=300mA, Depth=5mm, Lead Free="Lead Free", Length=7.7mm, Max Current Rating=300mA, Mechanical Life=10000Cycles, Mount="Surface Mount", Orientation="Right Angle", Packaging="Tape and Reel", REACH SVHC="No SVHC", Switch Function=On-On, Switch Travel=1.5mm, Termination="Gull Wing", Throw Configuration=SPDT, Voltage Rating (AC)=6V, Voltage Rating (DC)=6V, Width=6.7mm

## Via types
v1: diameter 19.68, hole 13.78, Top Layer to Bottom Layer, 80 vias
v2: diameter 50, hole 28, Top Layer to Bottom Layer, 36 vias

## Nets (pads, with @x,y where several pads share a name; then routed paths per layer and width w, separated by ;. In a path a pad name is that pad's centre, name@x,y a point inside that pad or via, vN(x,y) a via of type N, cw(c..) or ccw(c..) an arc to the next point about the centre after c; other vN are vias at no path point)
pads on no net: BT1.1 BT1.2 BT1.3 BT1_1.1 BT1_1.2 BT1_1.3 BT1_2.1 BT1_2.2 BT1_2.3 BT1_3.1 BT1_3.2 BT1_3.3 C1.0 C1.1 C1_1.0 C1_1.1 C1_2.0 C1_2.1 C1_3.0 C1_3.1 C2.0 C2.1 C2_1.0 C2_1.1 C2_2.0 C2_2.1 C2_3.0 C2_3.1 C3.0 C3.1 C3_1.0 C3_1.1 C3_2.0 C3_2.1 C3_3.0 C3_3.1 C4.0 C4.1 C4_1.0 C4_1.1 C4_2.0 C4_2.1 C4_3.0 C4_3.1 C5.0 C5.1 C5_1.0 C5_1.1 C5_2.0 C5_2.1 C5_3.0 C5_3.1 C6.0 C6.1 C6_1.0 C6_1.1 C6_2.0 C6_2.1 C6_3.0 C6_3.1 C7.0 C7.1 C7_1.0 C7_1.1 C7_2.0 C7_2.1 C7_3.0 C7_3.1 C8.0 C8.1 C8_1.0 C8_1.1 C8_2.0 C8_2.1 C8_3.0 C8_3.1 D1.1 D1.2 D1_1.1 D1_1.2 D1_2.1 D1_2.2 D1_3.1 D1_3.2 D2.1 D2.2 D2_1.1 D2_1.2 D2_2.1 D2_2.2 D2_3.1 D2_3.2 D3.1 D3.2 D3_1.1 D3_1.2 D3_2.1 D3_2.2 D3_3.1 D3_3.2 D4.1 D4.2 D4_1.1 D4_1.2 D4_2.1 D4_2.2 D4_3.1 D4_3.2 D5.1 D5.2 D5_1.1 D5_1.2 D5_2.1 D5_2.2 D5_3.1 D5_3.2 D6.1 D6.2 D6_1.1 D6_1.2 D6_2.1 D6_2.2 D6_3.1 D6_3.2 D7.1 D7.2 D7_1.1 D7_1.2 D7_2.1 D7_2.2 D7_3.1 D7_3.2 D8.1 D8.2 D8_1.1 D8_1.2 D8_2.1 D8_2.2 D8_3.1 D8_3.2 D9.1 D9.2 D9_1.1 D9_1.2 D9_2.1 D9_2.2 D9_3.1 D9_3.2 D10.1 D10.2 D10_1.1 D10_1.2 D10_2.1 D10_2.2 D10_3.1 D10_3.2 D11.1 D11.2 D11_1.1 D11_1.2 D11_2.1 D11_2.2 D11_3.1 D11_3.2 D12.1 D12.2 D12_1.1 D12_1.2 D12_2.1 D12_2.2 D12_3.1 D12_3.2 R1.1 R1.2 R1_1.1 R1_1.2 R1_2.1 R1_2.2 R1_3.1 R1_3.2 R2.1 R2.2 R2_1.1 R2_1.2 R2_2.1 R2_2.2 R2_3.1 R2_3.2 R3.1 R3.2 R3_1.1 R3_1.2 R3_2.1 R3_2.2 R3_3.1 R3_3.2 R4.1 R4.2 R4_1.1 R4_1.2 R4_2.1 R4_2.2 R4_3.1 R4_3.2 R5.1 R5.2 R5_1.1 R5_1.2 R5_2.1 R5_2.2 R5_3.1 R5_3.2 R6.1 R6.2 R6_1.1 R6_1.2 R6_2.1 R6_2.2 R6_3.1 R6_3.2 R7.1 R7.2 R7_1.1 R7_1.2 R7_2.1 R7_2.2 R7_3.1 R7_3.2 R8.1 R8.2 R8_1.1 R8_1.2 R8_2.1 R8_2.2 R8_3.1 R8_3.2 R9.1 R9.2 R9_1.1 R9_1.2 R9_2.1 R9_2.2 R9_3.1 R9_3.2 R10.1 R10.2 R10_1.1 R10_1.2 R10_2.1 R10_2.2 R10_3.1 R10_3.2 R11.1 R11.2 R11_1.1 R11_1.2 R11_2.1 R11_2.2 R11_3.1 R11_3.2 R12.1 R12.2 R12_1.1 R12_1.2 R12_2.1 R12_2.2 R12_3.1 R12_3.2 SW1. SW1.1 SW1.2 SW1.3 SW1.4 SW1.5 SW1.6 SW1.7 SW1_1. SW1_1.1 SW1_1.2 SW1_1.3 SW1_1.4 SW1_1.5 SW1_1.6 SW1_1.7 SW1_2. SW1_2.1 SW1_2.2 SW1_2.3 SW1_2.4 SW1_2.5 SW1_2.6 SW1_2.7 SW1_3. SW1_3.1 SW1_3.2 SW1_3.3 SW1_3.4 SW1_3.5 SW1_3.6 SW1_3.7
copper on no net: | length 49629.6
  Top Layer w0: 1158.07,2694.73 1158.07,2707.06 ; 1158.07,4722.29 1158.07,4734.62 ; 1319.17,2485.01 1322.63,2481.55 ; 1319.17,4512.57 1322.63,4509.11 ; 2269.21,1759.98 2278.75,1769.53 ; 2269.21,3787.54 2278.75,3797.09 ; 3185.63,2694.73 3185.63,2707.06 ; 3185.63,4722.29 3185.63,4734.62 ; 3346.73,2485.01 3350.19,2481.55 ; 3346.73,4512.57 3350.19,4509.11 ; 4296.77,1759.98 4306.31,1769.53 ; 4296.77,3787.54 4306.31,3797.09
  Top Layer w10: 823.72,2524.55 850.1,2498.17 961.52,2498.17 1099.61,2636.27 ; 823.72,2724.55 823.72,2763.92 910.94,2851.14 1069.78,2851.14 ; 823.72,4552.11 850.1,4525.73 961.52,4525.73 1099.61,4663.82 ; 823.72,4752.11 823.72,4791.48 910.94,4878.7 1069.78,4878.7 ; 1069.78,2794.81 1070.32,2794.81 1158.07,2707.06 ; 1069.78,4822.37 1070.32,4822.37 1158.07,4734.62 ; 1120.71,1746.2 1130.19,1736.72 1417.85,1736.72 1473.33,1681.24 2073.72,1681.24 ; 1120.71,3773.76 1130.19,3764.28 1417.85,3764.28 1473.33,3708.8 2073.72,3708.8 ; 1191.79,1840.53 1216.66,1832.78 1379.71,1841.12 1449.51,1858.41 1532.38,1720.61 1870.87,1720.61 1928.33,1817.15 1969.59,1858.41 ; 1191.79,3868.09 1216.66,3860.34 1379.71,3868.67 1449.51,3885.97 1532.38,3748.17 1870.87,3748.17 1928.33,3844.71 1969.59,3885.97 ; 1306.3,2498.47 1312.05,2498.47 1327.19,2483.33 1482.58,2483.33 ; 1306.3,4526.03 1312.05,4526.03 1327.19,4510.89 1482.58,4510.89 ; 1321.24,2487.08 1324.7,2483.62 ; 1321.24,4514.64 1324.7,4511.18 ; 1364.76,2556.93 1437.11,2629.28 1650.49,2629.28 ; 1364.76,4584.49 1437.11,4656.84 1650.49,4656.84 ; v2(1650.49,2771.8) 1650.49,2629.28 ; v2(1650.49,4799.35) 1650.49,4656.84 ; 1847.34,2969.25 1847.88,2969.25 1897.86,3019.23 1926.68,3019.23 ; 1847.34,4996.81 1847.88,4996.81 1897.86,5046.79 1926.68,5046.79 ; 1985.14,2960.77 1975.3,2960.77 1896.56,2882.03 1896.56,2852.5 1847.34,2803.29 1807.97,2803.29 1768.6,2763.92 1768.6,2629.28 ; 1985.14,3393.84 2011.47,3393.84 2030.84,3413.21 2131.73,3413.21 2142.62,3402.32 ; 1985.14,4988.33 1975.3,4988.33 1896.56,4909.59 1896.56,4880.06 1847.34,4830.85 1807.97,4830.85 1768.6,4791.48 1768.6,4656.84 ; 1985.14,5421.4 2011.47,5421.4 2030.84,5440.77 2131.73,5440.77 2142.62,5429.88 ; 2043.6,3335.38 2398.52,2980.46 2398.52,2557.23 2447.74,2508.02 2595.37,2508.02 2595.37,2232.43 2536.91,2173.96 2437.3,2173.96 ; 2043.6,5362.94 2398.52,5008.02 2398.52,4584.79 2447.74,4535.58 2595.37,4535.58 2595.37,4259.98 2536.91,4201.52 2437.3,4201.52 ; 2278.75,1769.53 2388.98,1769.53 ; 2278.75,3797.09 2388.98,3797.09 ; 2392.01,2232.43 2406.47,2232.43 2486.57,2312.53 2487.11,2312.53 ; 2392.01,4259.98 2406.47,4259.98 2486.57,4340.09 2487.11,4340.09 ; 2447.44,1711.07 2417.61,1681.24 2073.72,1681.24 ; 2447.44,3738.63 2417.61,3708.8 2073.72,3708.8 ; 2851.28,2524.55 2877.66,2498.17 2989.07,2498.17 3127.17,2636.27 ; 2851.28,2724.55 2851.28,2763.92 2938.5,2851.14 3097.34,2851.14 ; 2851.28,4552.11 2877.66,4525.73 2989.07,4525.73 3127.17,4663.82 ; 2851.28,4752.11 2851.28,4791.48 2938.5,4878.7 3097.34,4878.7 ; 3097.34,2794.81 3097.88,2794.81 3185.63,2707.06 ; 3097.34,4822.37 3097.88,4822.37 3185.63,4734.62 ; 3148.27,1746.2 3157.75,1736.72 3445.41,1736.72 3500.89,1681.24 4101.28,1681.24 ; 3148.27,3773.76 3157.75,3764.28 3445.41,3764.28 3500.89,3708.8 4101.28,3708.8 ; 3219.35,1840.53 3244.22,1832.78 3407.27,1841.12 3477.07,1858.41 3559.94,1720.61 3898.43,1720.61 3955.89,1817.15 3997.15,1858.41 ; 3219.35,3868.09 3244.22,3860.34 3407.27,3868.67 3477.07,3885.97 3559.94,3748.17 3898.43,3748.17 3955.89,3844.71 3997.15,3885.97 ; 3333.86,2498.47 3339.61,2498.47 3354.75,2483.33 3510.14,2483.33 ; 3333.86,4526.03 3339.61,4526.03 3354.75,4510.89 3510.14,4510.89 ; 3348.8,2487.08 3352.26,2483.62 ; 3348.8,4514.64 3352.26,4511.18 ; 3392.32,2556.93 3464.67,2629.28 3678.05,2629.28 ; 3392.32,4584.49 3464.67,4656.84 3678.05,4656.84 ; v2(3678.05,2771.8) 3678.05,2629.28 ; v2(3678.05,4799.35) 3678.05,4656.84 ; 3874.9,2969.25 3875.43,2969.25 3925.42,3019.23 3954.24,3019.23 ; 3874.9,4996.81 3875.43,4996.81 3925.42,5046.79 3954.24,5046.79 ; 4012.7,2960.77 4002.85,2960.77 3924.11,2882.03 3924.11,2852.5 3874.9,2803.29 3835.53,2803.29 3796.16,2763.92 3796.16,2629.28 ; 4012.7,3393.84 4039.03,3393.84 4058.4,3413.21 4159.29,3413.21 4170.18,3402.32 ; 4012.7,4988.33 4002.85,4988.33 3924.11,4909.59 3924.11,4880.06 3874.9,4830.85 3835.53,4830.85 3796.16,4791.48 3796.16,4656.84 ; 4012.7,5421.4 4039.03,5421.4 4058.4,5440.77 4159.29,5440.77 4170.18,5429.88 ; 4071.16,3335.38 4426.08,2980.46 4426.08,2557.23 4475.3,2508.02 4622.93,2508.02 4622.93,2232.43 4564.47,2173.96 4464.86,2173.96 ; 4071.16,5362.94 4426.08,5008.02 4426.08,4584.79 4475.3,4535.58 4622.93,4535.58 4622.93,4259.98 4564.47,4201.52 4464.86,4201.52 ; 4306.31,1769.53 4416.54,1769.53 ; 4306.31,3797.09 4416.54,3797.09 ; 4419.57,2232.43 4434.03,2232.43 4514.13,2312.53 4514.67,2312.53 ; 4419.57,4259.98 4434.03,4259.98 4514.13,4340.09 4514.67,4340.09 ; 4475,1711.07 4445.17,1681.24 4101.28,1681.24 ; 4475,3738.63 4445.17,3708.8 4101.28,3708.8 ; 1650.49,2629.28 1768.6,2629.28 ; 1650.49,4656.84 1768.6,4656.84 ; 1768.6,2629.28 1854.04,2629.28 1965.45,2517.86 1965.45,2094.63 2073.72,1986.36 2073.72,1681.24 ; 1768.6,4656.84 1854.04,4656.84 1965.45,4545.42 1965.45,4122.19 2073.72,4013.92 2073.72,3708.8 ; 3678.05,2629.28 3796.16,2629.28 ; 3678.05,4656.84 3796.16,4656.84 ; 3796.16,2629.28 3881.59,2629.28 3993.01,2517.86 3993.01,2094.63 4101.28,1986.36 4101.28,1681.24 ; 3796.16,4656.84 3881.59,4656.84 3993.01,4545.42 3993.01,4122.19 4101.28,4013.92 4101.28,3708.8
  Bottom Layer w0: 1964.92,2556.93 1964.92,2558.29 ; 1964.92,4584.49 1964.92,4585.85 ; 2086.46,2498.47 2112.79,2498.47 ; 2086.46,4526.03 2112.79,4526.03 ; 3992.48,2556.93 3992.48,2558.29 ; 3992.48,4584.49 3992.48,4585.85 ; 4114.02,2498.47 4140.35,2498.47 ; 4114.02,4526.03 4140.35,4526.03
  Bottom Layer w10: 863.09,2117.04 863.68,2116.45 863.68,1977.11 ; 863.09,4144.6 863.68,4144.01 863.68,4004.67 ; 922.15,2035.58 1000.89,2114.32 1000.89,2311.17 823.72,2488.33 823.72,2527.7 872.93,2527.7 951.67,2606.44 951.67,2872.19 1375.2,3295.71 ; 922.15,4063.13 1000.89,4141.87 1000.89,4338.73 823.72,4515.89 823.72,4555.26 872.93,4555.26 951.67,4634 951.67,4899.75 1375.2,5323.27 ; 1198.03,1957.13 1198.03,1981.26 1187.89,1991.4 1187.89,2035.58 1276.48,2124.16 1317.21,2124.16 ; 1198.03,3984.69 1198.03,4008.82 1187.89,4018.96 1187.89,4063.13 1276.48,4151.72 1317.21,4151.72 ; 1256.49,2015.59 1398.23,2015.59 1465.45,2082.82 1465.45,2484.39 1591.44,2610.38 1634.74,2610.38 1650.49,2626.13 ; 1256.49,4043.15 1398.23,4043.15 1465.45,4110.38 1465.45,4511.95 1591.44,4637.94 1634.74,4637.94 1650.49,4653.69 ; 1304.64,3403.69 1384.15,3403.69 1433.66,3354.18 ; 1304.64,5431.24 1384.15,5431.24 1433.66,5381.74 ; 1444.1,2970.91 1463.19,2970.91 1493.01,2941.09 1543.59,2941.09 1552.07,2949.57 ; 1444.1,4998.47 1463.19,4998.47 1493.01,4968.65 1543.59,4968.65 1552.07,4977.13 ; 1502.56,3029.37 1601.58,3029.37 1650.49,2980.46 1650.49,2815.1 v2(1650.49,2771.8) 1650.49,2626.13 ; 1502.56,5056.93 1601.58,5056.93 1650.49,5008.02 1650.49,4842.66 v2(1650.49,4799.35) 1650.49,4653.69 ; 1945.77,2578.28 1946.3,2578.28 1964.92,2559.66 1964.92,2558.29 ; 1945.77,4605.84 1946.3,4605.84 1964.92,4587.22 1964.92,4585.85 ; 1964.92,2556.93 2054.33,2556.93 ; 1964.92,4584.49 2054.33,4584.49 ; 2086.46,2498.47 2066.48,2478.49 1876.87,2478.49 1867.03,2488.33 1867.03,2547.39 1847.34,2567.07 1802.97,2567.07 1768.6,2601.44 1768.6,2629.28 1765.45,2626.13 1650.49,2626.13 ; 2086.46,4526.03 2066.48,4506.05 1876.87,4506.05 1867.03,4515.89 1867.03,4574.95 1847.34,4594.63 1802.97,4594.63 1768.6,4629 1768.6,4656.84 1765.45,4653.69 1650.49,4653.69 ; 2290.55,2714.41 2290.55,2734.69 2339.47,2783.61 2390.04,2783.61 ; 2290.55,4741.97 2290.55,4762.25 2339.47,4811.17 2390.04,4811.17 ; 2349.01,2655.95 2496.95,2508.02 2595.37,2508.02 ; 2349.01,4683.51 2496.95,4535.58 2595.37,4535.58 ; 2890.65,2117.04 2891.24,2116.45 2891.24,1977.11 ; 2890.65,4144.6 2891.24,4144.01 2891.24,4004.67 ; 2949.7,2035.58 3028.44,2114.32 3028.44,2311.17 2851.28,2488.33 2851.28,2527.7 2900.49,2527.7 2979.23,2606.44 2979.23,2872.19 3402.76,3295.71 ; 2949.7,4063.13 3028.44,4141.87 3028.44,4338.73 2851.28,4515.89 2851.28,4555.26 2900.49,4555.26 2979.23,4634 2979.23,4899.75 3402.76,5323.27 ; 3225.59,1957.13 3225.59,1981.26 3215.45,1991.4 3215.45,2035.58 3304.04,2124.16 3344.77,2124.16 ; 3225.59,3984.69 3225.59,4008.82 3215.45,4018.96 3215.45,4063.13 3304.04,4151.72 3344.77,4151.72 ; 3284.05,2015.59 3425.79,2015.59 3493.01,2082.82 3493.01,2484.39 3619,2610.38 3662.3,2610.38 3678.05,2626.13 ; 3284.05,4043.15 3425.79,4043.15 3493.01,4110.38 3493.01,4511.95 3619,4637.94 3662.3,4637.94 3678.05,4653.69 ; 3332.2,3403.69 3411.71,3403.69 3461.22,3354.18 ; 3332.2,5431.24 3411.71,5431.24 3461.22,5381.74 ; 3471.65,2970.91 3490.75,2970.91 3520.57,2941.09 3571.15,2941.09 3579.63,2949.57 ; 3471.65,4998.47 3490.75,4998.47 3520.57,4968.65 3571.15,4968.65 3579.63,4977.13 ; 3530.12,3029.37 3629.14,3029.37 3678.05,2980.46 3678.05,2815.1 v2(3678.05,2771.8) 3678.05,2626.13 ; 3530.12,5056.93 3629.14,5056.93 3678.05,5008.02 3678.05,4842.66 v2(3678.05,4799.35) 3678.05,4653.69 ; 3973.33,2578.28 3973.86,2578.28 3992.48,2559.66 3992.48,2558.29 ; 3973.33,4605.84 3973.86,4605.84 3992.48,4587.22 3992.48,4585.85 ; 3992.48,2556.93 4081.89,2556.93 ; 3992.48,4584.49 4081.89,4584.49 ; 4114.02,2498.47 4094.04,2478.49 3904.43,2478.49 3894.59,2488.33 3894.59,2547.39 3874.9,2567.07 3830.53,2567.07 3796.16,2601.44 3796.16,2629.28 3793.01,2626.13 3678.05,2626.13 ; 4114.02,4526.03 4094.04,4506.05 3904.43,4506.05 3894.59,4515.89 3894.59,4574.95 3874.9,4594.63 3830.53,4594.63 3796.16,4629 3796.16,4656.84 3793.01,4653.69 3678.05,4653.69 ; 4318.11,2714.41 4318.11,2734.69 4367.03,2783.61 4417.6,2783.61 ; 4318.11,4741.97 4318.11,4762.25 4367.03,4811.17 4417.6,4811.17 ; 4376.57,2655.95 4524.51,2508.02 4622.93,2508.02 ; 4376.57,4683.51 4524.51,4535.58 4622.93,4535.58
  other v1: 2004.82,3069.04 4032.38,3069.04 1414.96,3076.57 3442.52,3076.57 1985.82,3091.04 4013.38,3091.04 1433.96,3098.57 3461.52,3098.57 1362.96,3113.84 1968.82,3114.04 3390.52,3113.84 3996.38,3114.04 2058.82,3117.15 4086.38,3117.15 1450.96,3121.57 3478.52,3121.57 1951.82,3137.04 3979.38,3137.04 1380.96,3137.84 3408.52,3137.84 2040.82,3141.15 4068.38,3141.15 1467.96,3144.57 3495.52,3144.57 1933.82,3160.04 3961.38,3160.04 1399.96,3160.84 3427.52,3160.84 2021.82,3164.15 4049.38,3164.15 1485.96,3167.57 3513.52,3167.57 1416.96,3183.84 3444.52,3183.84 2004.82,3187.15 4032.38,3187.15 1433.96,3206.84 3461.52,3206.84 1987.82,3210.15 4015.38,3210.15 2004.82,5096.6 4032.38,5096.6 1414.96,5104.13 3442.52,5104.13 1985.82,5118.6 4013.38,5118.6 1433.96,5126.13 3461.52,5126.13 1362.96,5141.39 3390.52,5141.39 1968.82,5141.6 3996.38,5141.6 2058.82,5144.71 4086.38,5144.71 1450.96,5149.13 3478.52,5149.13 1380.96,5165.39 1951.82,5164.6 3408.52,5165.39 3979.38,5164.6 2040.82,5168.71 4068.38,5168.71 1467.96,5172.13 3495.52,5172.13 1399.96,5188.39 1933.82,5187.6 3427.52,5188.39 3961.38,5187.6 2021.82,5191.71 4049.38,5191.71 1485.96,5195.13 3513.52,5195.13 1416.96,5211.39 3444.52,5211.39 2004.82,5214.71 4032.38,5214.71 1433.96,5234.39 3461.52,5234.39 1987.82,5237.71 4015.38,5237.71
  other v2: 2595.37,2124.16 4622.93,2124.16 1542.22,2301.32 1876.87,2301.32 3569.78,2301.32 3904.43,2301.32 833.56,2340.69 2861.12,2340.69 1542.22,2744.24 3569.78,2744.24 1876.87,2754.08 3904.43,2754.08 2575.69,2872.19 4603.25,2872.19 1000.89,3069.04 3028.44,3069.04 2595.37,4151.72 4622.93,4151.72 1542.22,4328.88 1876.87,4328.88 3569.78,4328.88 3904.43,4328.88 833.56,4368.25 2861.12,4368.25 1542.22,4771.8 3569.78,4771.8 1876.87,4781.64 3904.43,4781.64 2575.69,4899.75 4603.25,4899.75 1000.89,5096.6 3028.44,5096.6

## Polygon pours and split planes (outlines as drawn)
no net on Top Layer "NONET_L01_P020" (solid, pour order 20): 2949.7,3511.95 3687.89,3511.95 3203.79,2856.66 3207.47,2822.73 3363.09,2813.13 3085.42,2383.97 3090.75,2355.32 3292.86,2346.12 2792.22,1622.19 2792.22,2921.4 2949.7,2921.4
no net on Top Layer "NONET_L01_P019" (solid, pour order 19): 3786.32,3511.95 4287.04,2865.61 4239.07,2842.66 4081.59,2842.66 4398.59,2404.65 4357.18,2380.06 4169.7,2369.86 4298.13,2202.9 4681.99,1622.19 4681.99,3511.95 3845.37,3511.95
no net on Top Layer "NONET_L01_P018" (solid, pour order 18): 3737.22,3447.27 4199.7,2878.1 4071.75,2878.1 4040.26,2852.5 4347.34,2389.91 4150.49,2389.91 4140.65,2380.06 4642.62,1622.19 2841.44,1622.19 3353.25,2380.06 3363.09,2389.91 3166.24,2409.59 3441.83,2862.35 3284.35,2878.1 3678.05,3374.16
no net on Top Layer "NONET_L01_P014" (solid, pour order 14): 922.15,3511.95 1660.33,3511.95 1176.23,2856.66 1179.92,2822.73 1335.53,2813.13 1057.86,2383.97 1063.19,2355.32 1265.3,2346.12 764.67,1622.19 764.67,2921.4 922.15,2921.4
no net on Top Layer "NONET_L01_P013" (solid, pour order 13): 1758.76,3511.95 2259.48,2865.61 2211.52,2842.66 2054.04,2842.66 2371.03,2404.65 2329.63,2380.06 2142.14,2369.86 2270.57,2202.9 2654.43,1622.19 2654.43,3511.95 1817.81,3511.95
no net on Top Layer "NONET_L01_P012" (solid, pour order 12): 1709.67,3447.27 2172.15,2878.1 2044.19,2878.1 2012.7,2852.5 2319.78,2389.91 2122.93,2389.91 2113.09,2380.06 2615.06,1622.19 813.88,1622.19 1325.69,2380.06 1335.53,2389.91 1138.68,2409.59 1414.27,2862.35 1256.79,2878.1 1650.49,3374.16
no net on Top Layer "NONET_L01_P008" (solid, pour order 8): 2949.7,5539.51 3687.89,5539.51 3203.79,4884.22 3207.47,4850.29 3363.09,4840.69 3085.42,4411.53 3090.75,4382.87 3292.86,4373.68 2792.22,3649.75 2792.22,4948.96 2949.7,4948.96
no net on Top Layer "NONET_L01_P007" (solid, pour order 7): 3786.32,5539.51 4287.04,4893.17 4239.07,4870.22 4081.59,4870.22 4398.59,4432.21 4357.18,4407.62 4169.7,4397.41 4298.13,4230.46 4681.99,3649.75 4681.99,5539.51 3845.37,5539.51
no net on Top Layer "NONET_L01_P006" (solid, pour order 6): 3737.22,5474.83 4199.7,4905.65 4071.75,4905.65 4040.26,4880.06 4347.34,4417.47 4150.49,4417.47 4140.65,4407.62 4642.62,3649.75 2841.44,3649.75 3353.25,4407.62 3363.09,4417.47 3166.24,4437.15 3441.83,4889.91 3284.35,4905.65 3678.05,5401.72
no net on Top Layer "NONET_L01_P002" (solid, pour order 2): 922.15,5539.51 1660.33,5539.51 1176.23,4884.22 1179.92,4850.29 1335.53,4840.69 1057.86,4411.53 1063.19,4382.87 1265.3,4373.68 764.67,3649.75 764.67,4948.96 922.15,4948.96
no net on Top Layer "NONET_L01_P001" (solid, pour order 1): 1758.76,5539.51 2259.48,4893.17 2211.52,4870.22 2054.04,4870.22 2371.03,4432.21 2329.63,4407.62 2142.14,4397.41 2270.57,4230.46 2654.43,3649.75 2654.43,5539.51 1817.81,5539.51
no net on Top Layer "NONET_L01_P000" (solid, pour order 0): 1709.67,5474.83 2172.15,4905.65 2044.19,4905.65 2012.7,4880.06 2319.78,4417.47 2122.93,4417.47 2113.09,4407.62 2615.06,3649.75 813.88,3649.75 1325.69,4407.62 1335.53,4417.47 1138.68,4437.15 1414.27,4889.91 1256.79,4905.65 1650.49,5401.72
no net on Bottom Layer "NONET_L02_P023" (solid, pour order 23): 3737.22,3447.27 4199.7,2878.1 4071.75,2878.1 4040.26,2852.5 4347.34,2389.91 4150.49,2389.91 4140.65,2380.06 4642.62,1622.19 2841.44,1622.19 3353.25,2380.06 3363.09,2389.91 3166.24,2409.59 3441.83,2862.35 3284.35,2878.1 3678.05,3374.16
no net on Bottom Layer "NONET_L02_P022" (solid, pour order 22): 3786.32,3511.95 4287.04,2865.61 4239.07,2842.66 4081.59,2842.66 4398.59,2404.65 4357.18,2380.06 4169.7,2369.86 4298.13,2202.9 4681.99,1622.19 4681.99,3511.95 3845.37,3511.95
no net on Bottom Layer "NONET_L02_P021" (solid, pour order 21): 2949.7,3511.95 3687.89,3511.95 3203.79,2856.66 3207.47,2822.73 3363.09,2813.13 3085.42,2383.97 3090.75,2355.32 3292.86,2346.12 2792.22,1622.19 2792.22,2921.4 2949.7,2921.4
no net on Bottom Layer "NONET_L02_P017" (solid, pour order 17): 1709.67,3447.27 2172.15,2878.1 2044.19,2878.1 2012.7,2852.5 2319.78,2389.91 2122.93,2389.91 2113.09,2380.06 2615.06,1622.19 813.88,1622.19 1325.69,2380.06 1335.53,2389.91 1138.68,2409.59 1414.27,2862.35 1256.79,2878.1 1650.49,3374.16
no net on Bottom Layer "NONET_L02_P016" (solid, pour order 16): 1758.76,3511.95 2259.48,2865.61 2211.52,2842.66 2054.04,2842.66 2371.03,2404.65 2329.63,2380.06 2142.14,2369.86 2270.57,2202.9 2654.43,1622.19 2654.43,3511.95 1817.81,3511.95
no net on Bottom Layer "NONET_L02_P015" (solid, pour order 15): 922.15,3511.95 1660.33,3511.95 1176.23,2856.66 1179.92,2822.73 1335.53,2813.13 1057.86,2383.97 1063.19,2355.32 1265.3,2346.12 764.67,1622.19 764.67,2921.4 922.15,2921.4
no net on Bottom Layer "NONET_L02_P011" (solid, pour order 11): 3737.22,5474.83 4199.7,4905.65 4071.75,4905.65 4040.26,4880.06 4347.34,4417.47 4150.49,4417.47 4140.65,4407.62 4642.62,3649.75 2841.44,3649.75 3353.25,4407.62 3363.09,4417.47 3166.24,4437.15 3441.83,4889.91 3284.35,4905.65 3678.05,5401.72
no net on Bottom Layer "NONET_L02_P010" (solid, pour order 10): 3786.32,5539.51 4287.04,4893.17 4239.07,4870.22 4081.59,4870.22 4398.59,4432.21 4357.18,4407.62 4169.7,4397.41 4298.13,4230.46 4681.99,3649.75 4681.99,5539.51 3845.37,5539.51
no net on Bottom Layer "NONET_L02_P009" (solid, pour order 9): 2949.7,5539.51 3687.89,5539.51 3203.79,4884.22 3207.47,4850.29 3363.09,4840.69 3085.42,4411.53 3090.75,4382.87 3292.86,4373.68 2792.22,3649.75 2792.22,4948.96 2949.7,4948.96
no net on Bottom Layer "NONET_L02_P005" (solid, pour order 5): 1709.67,5474.83 2172.15,4905.65 2044.19,4905.65 2012.7,4880.06 2319.78,4417.47 2122.93,4417.47 2113.09,4407.62 2615.06,3649.75 813.88,3649.75 1325.69,4407.62 1335.53,4417.47 1138.68,4437.15 1414.27,4889.91 1256.79,4905.65 1650.49,5401.72
no net on Bottom Layer "NONET_L02_P004" (solid, pour order 4): 1758.76,5539.51 2259.48,4893.17 2211.52,4870.22 2054.04,4870.22 2371.03,4432.21 2329.63,4407.62 2142.14,4397.41 2270.57,4230.46 2654.43,3649.75 2654.43,5539.51 1817.81,5539.51
no net on Bottom Layer "NONET_L02_P003" (solid, pour order 3): 922.15,5539.51 1660.33,5539.51 1176.23,4884.22 1179.92,4850.29 1335.53,4840.69 1057.86,4411.53 1063.19,4382.87 1265.3,4373.68 764.67,3649.75 764.67,4948.96 922.15,4948.96

## Silkscreen, mask and mechanical layers (free items; w line width, h text height)
Top Overlay:
  drawing of 228 lines, arcs and shapes, not listed
Bottom Overlay:
  drawing of 212 lines, arcs and shapes, not listed
Mechanical 1:
  drawing of 696 lines, arcs and shapes, not listed